# Altium PCB F1.PcbDoc
Units mil, origin at the board's own origin, x right, y up, seen from the top; angles counter-clockwise.
Board outline 2593.4 x 1102.5 mil, 2 copper layers (Top Layer, Bottom Layer); 2 components, 67 nets, 6 pads, 28 vias.
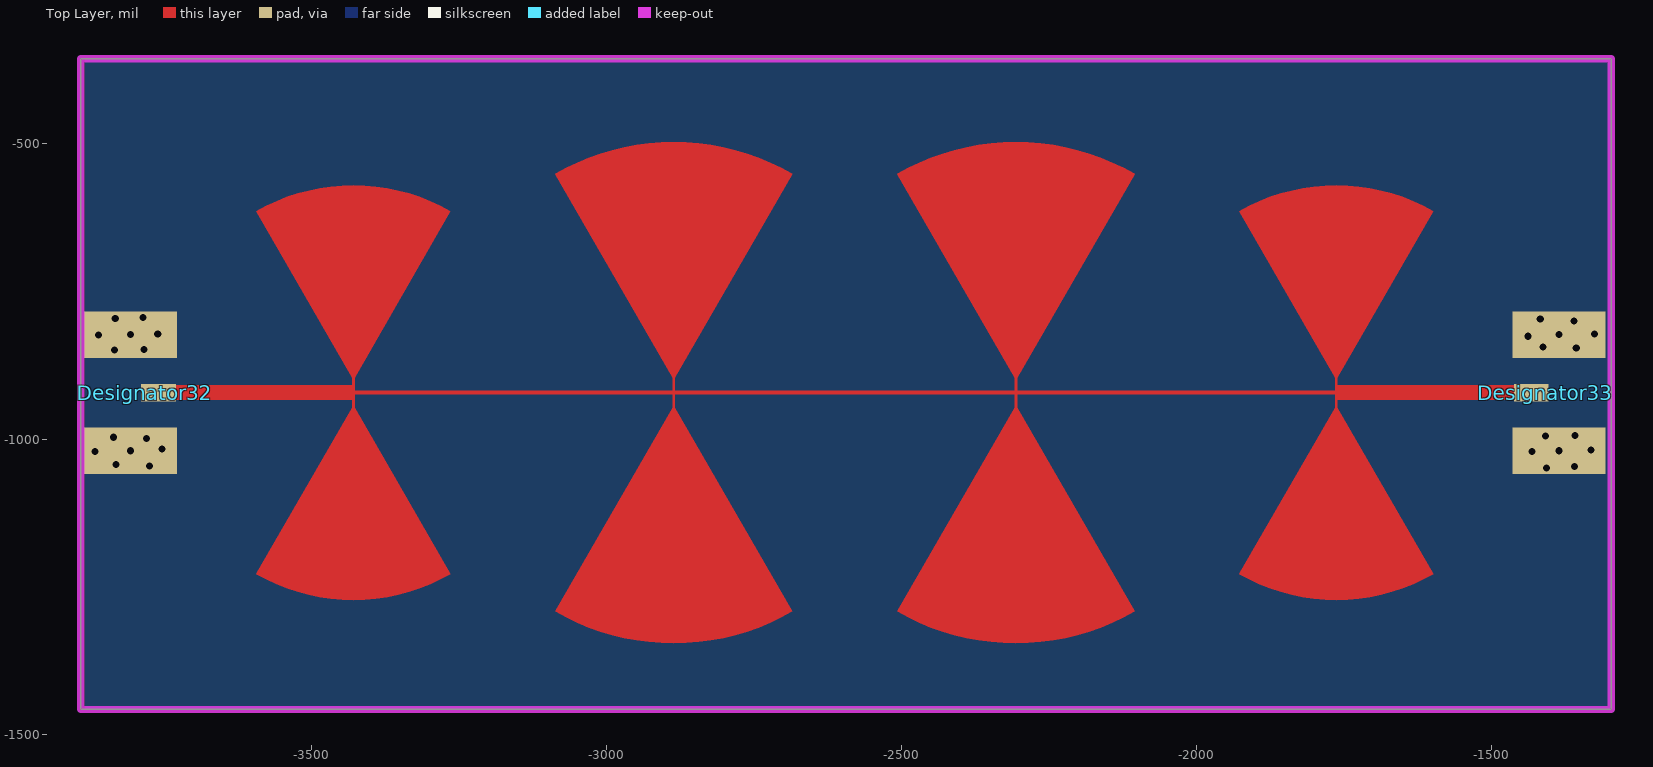
[diagram p0: Top Layer view]
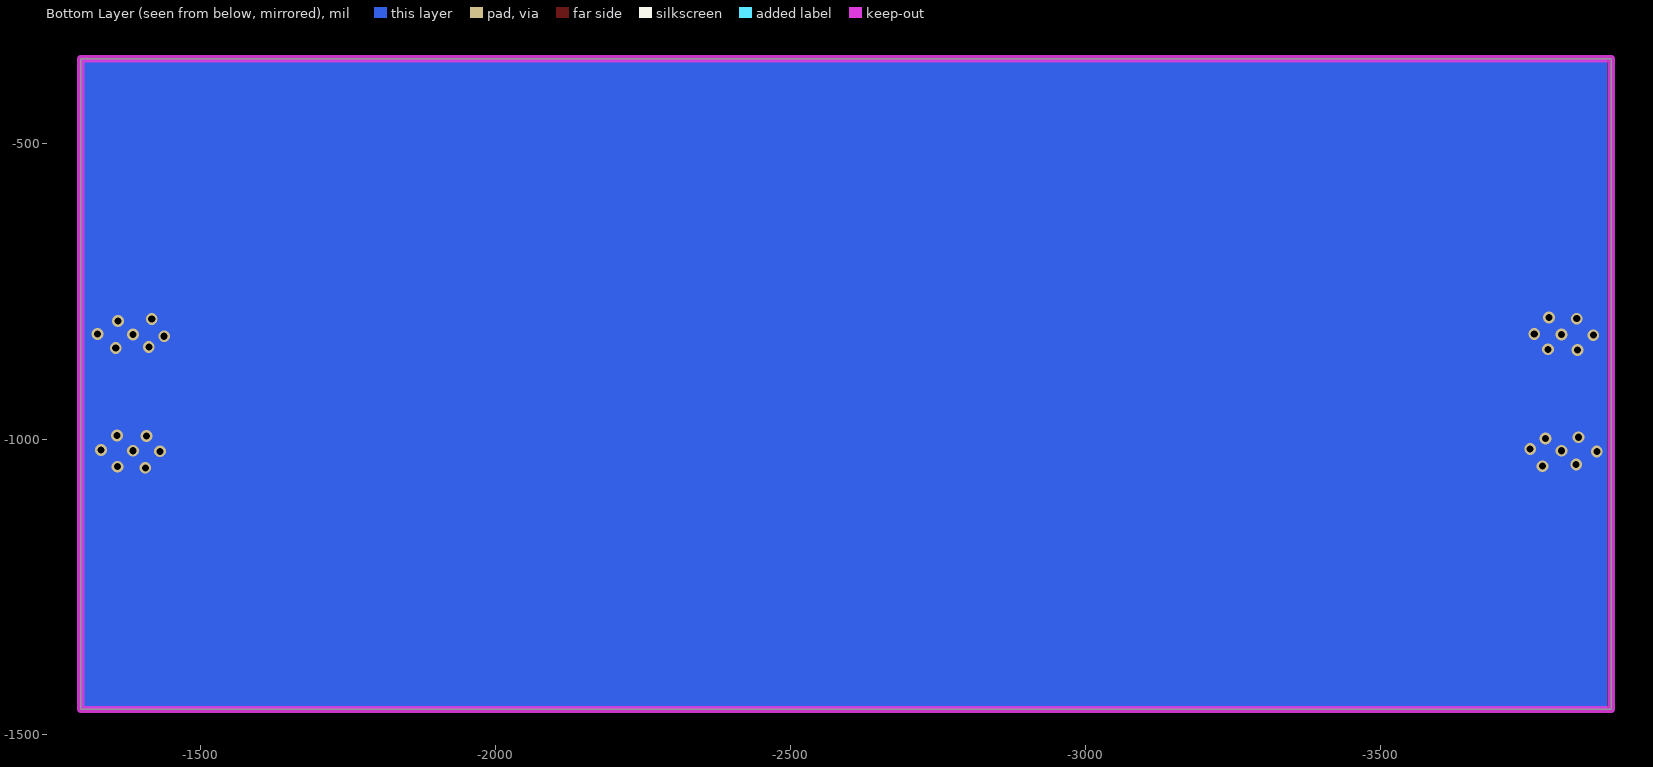
[diagram p1: Bottom Layer view, seen from below]

## Layer stack, top to bottom
Top Solder: solder mask 0.4, Solder Resist, Dk 3.5
Top Layer: signal copper 1.4
Dielectric 1: dielectric 12.6, FR-4, Dk 4.8
Bottom Layer: signal copper 1.4
Bottom Solder: solder mask 0.4, Solder Resist, Dk 3.5

## Board outline
-3890.4,-1458.1 -1297,-1458.1 -1297,-355.6 -3890.4,-355.6

## Design rules (kind name [scope] priority, off if disabled: settings)
Clearance [All] p1: gap=6
DiffPairsRouting [All] p1: maxlimit=10 minlimit=10 mostfreqgap=10 toplayer_minwidth=6 toplayer_maxwidth=15 toplayer_prefwidth=10 bottomlayer_minwidth=6 bottomlayer_maxwidth=15 bottomlayer_prefwidth=10 maxuncoupledlength=500
MinimumSolderMaskSliver [All] p1 off: minsoldermaskwidth=10
PlaneConnect [All] p1: planeconnectstyle=Direct reliefexpansion=20 reliefentries=4 reliefconductorwidth=10 reliefairgap=10
PolygonConnect [All] p1: connectstyle=Direct reliefconductorwidth=10 reliefentries=4 polygonreliefangle="90 Angle" airgapwidth=10
RoomDefinition JL2 [InComponentClass('JL2')] p1 off: confinementstyle=ConfineIn formatcopy=TRUE lockcomponents=FALSE outline -895.38,-2798.06 7189.62,-2798.06 7189.62,-2158.06 -895.38,-2158.06
RoutingVias [All] p1: holewidth=11.81 width=19.68 viastyle="Through Hole" minholewidth=11.81 minwidth=19.68 maxholewidth=28 maxwidth=50
SilkToBoardRegionClearance [All] p1 off:
SilkToSilkClearance [All] p1 off: silktosilkclearance=10
SilkToSolderMaskClearance [IsPad] p1 off: minsilkscreentomaskgap=10 clearancetoexposedcopper=TRUE
SolderMaskExpansion [All] p1: expansion=4
UnpouredPolygon [All] p1: allowunpoured=FALSE
Width [All] p1: maxlimit=30 minlimit=6 preferedwidth=10
23 further rules are at their usual default settings.

## Classes and differential pairs
differential pair TYPEC: +TYPEC_P -TYPEC_N
differential pair MCU_USB: +MCU_USB_P -MCU_USB_N

## Components (designator, comment, footprint, x,y, rotation, side; value= is the part's Value field where it differs from the comment)
Designator32 "Comment" SMA-2 -3806,-823 r270 top
Designator33 "Comment" SMA-2 -1385.36,-1019.8 r90 top

## Footprints (in the part's own frame and the unit in brackets; to place one, negate y for a bottom-side part, rotate by r counter-clockwise, add the part's x,y. Pads: shape width x height; smd on the part's side, far side on the other; paste and mask are expansions set on the pad)
SMA-2 [mm]
  rect 0.75x1.5 smd: 1(2.5,1.2)
  rect 2x4 smd: GND(0,0) GND(5,0)
  Top Layer pour cut-out: 1,2 4,2 4,-2 1,-2

## Via types
v1: diameter 20, hole 12, Top Layer to Bottom Layer, 28 vias

## Nets (pads, with @x,y where several pads share a name; then routed paths per layer and width w, separated by ;. In a path a pad name is that pad's centre, name@x,y a point inside that pad or via, vN(x,y) a via of type N, cw(c..) or ccw(c..) an arc to the next point about the centre after c; other vN are vias at no path point)
3V3: Designator32.1 Designator33.1
GND: Designator32.GND Designator33.GND
  other v1: -1406.36,-1048.8 -1359.36,-1046.8 -3774,-1046 -3831,-1043 -3866,-1021 -1431.36,-1020.8 -3806,-1019.85 -1385.36,-1019.8 -1331.36,-1018.8 -3753,-1017 -3779,-999 -3835,-997 -1408.36,-994.8 -1358.36,-993.8 -3833,-849 -3783,-848 -1356.36,-845.8 -1412.36,-843.8 -1438.36,-825.8 -3860,-824 -3806,-823 -1385.36,-822.95 -3760,-822 -1325.36,-821.8 -1360.36,-799.8 -1417.36,-796.8 -3832,-796 -3785,-794
MCU_USB_N: 
MCU_USB_P: 
NetC1_1: 
NetC3_1: 
NetC4_1: 
NetC5_2: 
NetC6_2: 
NetC7_2: 
NetC14_2: 
NetC15_2: 
NetC16_1: 
NetC17_2: 
NetLED1_1: 
NetLED2_1: 
NetP1_2: 
NetP1_3: 
NetR12_2: 
PA0: 
PA1: 
PA2: 
PA3: 
PA4: 
PA5: 
PA6: 
PA7: 
PA8: 
PA9: 
PA10: 
PA13: 
PA14: 
PA15: 
PB0: 
PB1: 
PB2: 
PB3: 
PB4: 
PB5: 
PB6: 
PB7: 
PB8: 
PB9: 
PB10: 
PB11: 
PB14: 
PB15: 
PC0: 
PC1: 
PC2: 
PC4: 
PC5: 
PC8: 
PC9: 
PC10: 
PC11: 
PC12: 
PC13: 
PC14: 
PC15: 
RST: 
SWCLK: 
SWDIO: 
SWO: 
TYPEC_N: 
TYPEC_P: 
VBUS: 

## Keep-outs
Keep-Out Layer:
  the board outline again, w12

## Other copper
Top Layer:
  region net 3V3: -3592.88,-1228.74 cw(c-3592.78,-1228.56) -3592.96,-1228.45 -3430.39,-946.87 -3430.39,-933.61 -3730.18,-933.61 cw(c-3730.18,-933.4) -3730.39,-933.4 -3730.39,-909.4 cw(c-3730.18,-909.4) -3730.18,-909.19 -3430.39,-909.19 -3430.39,-895.93 -3592.96,-614.35 cw(c-3592.78,-614.24) -3592.96,-614.35 cw(c-3592.78,-614.24) -3592.88,-614.06 cw(c-3428.45,-898.87) -3264.01,-614.06 cw(c-3264.12,-614.24) -3263.91,-614.24 cw(c-3264.12,-614.24) -3263.93,-614.35 -3263.94,-614.35 ccw(c-3264.12,-614.24) -3263.93,-614.35 -3263.94,-614.35 -3426.5,-895.93 -3426.5,-918.33 -2887.52,-918.33 -2887.52,-895.93 -3086.72,-550.9 -3086.72,-550.89 cw(c-3086.54,-550.79) -3086.64,-550.61 cw(c-2885.57,-898.87) -2684.5,-550.61 cw(c-2684.61,-550.79) -2684.39,-550.79 cw(c-2684.61,-550.79) -2684.42,-550.9 -2684.42,-550.89 cw(c-2684.61,-550.79) -2684.42,-550.9 -2684.42,-550.89 -2684.42,-550.9 -2883.63,-895.93 -2883.63,-918.33 -2307.73,-918.33 -2307.73,-895.93 -2506.93,-550.9 -2506.94,-550.89 cw(c-2506.75,-550.79) -2506.86,-550.61 cw(c-2305.79,-898.87) -2104.71,-550.61 cw(c-2104.82,-550.79) -2104.61,-550.79 cw(c-2104.82,-550.79) -2104.64,-550.9 -2104.63,-550.89 -2104.64,-550.9 ccw(c-2104.82,-550.79) -2104.63,-550.89 -2104.64,-550.9 -2303.84,-895.93 -2303.84,-918.33 -1764.85,-918.33 -1764.85,-895.93 -1927.42,-614.35 ccw(c-1927.24,-614.24) -1927.42,-614.35 cw(c-1927.24,-614.24) -1927.34,-614.06 cw(c-1762.91,-898.87) -1598.47,-614.06 cw(c-1598.58,-614.24) -1598.37,-614.24 cw(c-1598.58,-614.24) -1598.39,-614.35 -1598.4,-614.35 ccw(c-1598.58,-614.24) -1598.39,-614.35 -1598.4,-614.35 -1760.96,-895.93 -1760.96,-909.19 -1461.18,-909.19 cw(c-1461.18,-909.4) -1460.96,-909.4 -1460.96,-933.4 cw(c-1461.18,-933.4) -1461.18,-933.61 -1760.96,-933.61 -1760.96,-946.87 -1598.4,-1228.45 cw(c-1598.58,-1228.56) -1598.39,-1228.45 -1598.4,-1228.45 -1598.39,-1228.45 cw(c-1598.58,-1228.56) -1598.37,-1228.56 cw(c-1598.58,-1228.56) -1598.47,-1228.74 cw(c-1762.91,-943.93) -1927.34,-1228.74 cw(c-1927.24,-1228.56) -1927.42,-1228.45 -1764.85,-946.87 -1764.85,-924.47 -2303.84,-924.47 -2303.84,-946.87 -2104.64,-1291.9 -2104.63,-1291.91 ccw(c-2104.82,-1292.01) -2104.64,-1291.9 cw(c-2104.82,-1292.01) -2104.61,-1292.01 cw(c-2104.82,-1292.01) -2104.71,-1292.19 cw(c-2305.79,-943.93) -2506.86,-1292.19 cw(c-2506.75,-1292.01) -2506.94,-1291.91 -2506.93,-1291.9 -2307.73,-946.87 -2307.73,-924.47 -2883.63,-924.47 -2883.63,-946.87 -2684.42,-1291.9 -2684.42,-1291.91 ccw(c-2684.61,-1292.01) -2684.42,-1291.9 cw(c-2684.61,-1292.01) -2684.39,-1292.01 cw(c-2684.61,-1292.01) -2684.5,-1292.19 cw(c-2885.57,-943.93) -3086.64,-1292.19 cw(c-3086.54,-1292.01) -3086.72,-1291.91 -3086.72,-1291.9 -2887.52,-946.87 -2887.52,-924.47 -3426.5,-924.47 -3426.5,-946.87 -3263.94,-1228.45 cw(c-3264.12,-1228.56) -3263.93,-1228.45 -3263.94,-1228.45 -3263.93,-1228.45 cw(c-3264.12,-1228.56) -3263.91,-1228.56 cw(c-3264.12,-1228.56) -3264.01,-1228.74 cw(c-3428.45,-943.93)
Bottom Layer:
  rectangle net GND: -3883,-1458.1 -1297,-355.6

## Silkscreen, mask and mechanical layers (free items; w line width, h text height)
Bottom Solder:
  rectangle: -3888,-1108 -3684,-727
  rectangle: -1509,-1122 -1291,-720
Mechanical 2:
  lines w0.39: -3430.18,-921.4 -3426.72,-921.4 ; -3430.18,-921.4 -3430.18,-946.93 -3592.78,-1228.56 ccw(c-3428.45,-943.93) -3264.12,-1228.56 -3426.72,-946.93 -3426.72,-921.4 ; -3430.18,-921.4 -3426.72,-921.4 ; -3430.18,-921.4 -3430.18,-895.87 -3592.78,-614.24 cw(c-3428.45,-898.87) -3264.12,-614.25 -3426.72,-895.87 -3426.72,-921.4 ; -2887.3,-921.4 -2883.84,-921.4 ; -2887.3,-921.4 -2887.3,-946.93 -3086.54,-1292.01 ccw(c-2885.57,-943.93) -2684.61,-1292.01 -2883.84,-946.93 -2883.84,-921.4 ; -2887.3,-921.4 -2883.84,-921.4 ; -2887.3,-921.4 -2887.3,-895.87 -3086.54,-550.79 cw(c-2885.57,-898.87) -2684.61,-550.79 -2883.84,-895.87 -2883.84,-921.4 ; -2307.52,-921.4 -2304.05,-921.4 ; -2307.52,-921.4 -2307.52,-946.93 -2506.75,-1292.01 ccw(c-2305.79,-943.93) -2104.82,-1292.01 -2304.05,-946.93 -2304.05,-921.4 ; -2307.52,-921.4 -2304.05,-921.4 ; -2307.52,-921.4 -2307.52,-895.87 -2506.75,-550.79 cw(c-2305.79,-898.87) -2104.82,-550.79 -2304.05,-895.87 -2304.05,-921.4 ; -1764.64,-921.4 -1761.18,-921.4 ; -1764.64,-921.4 -1764.64,-946.93 -1927.24,-1228.56 ccw(c-1762.91,-943.93) -1598.58,-1228.56 -1761.18,-946.93 -1761.18,-921.4 ; -1764.64,-921.4 -1761.18,-921.4 ; -1764.64,-921.4 -1764.64,-895.87 -1927.24,-614.24 cw(c-1762.91,-898.87) -1598.58,-614.25 -1761.18,-895.87 -1761.18,-921.4 ; -1461.18,-933.4 -1761.18,-933.4 -1761.18,-909.4 -1461.18,-909.4 ; -1461.18,-933.4 -1461.18,-909.4 ; -1461.18,-933.4 -1461.18,-909.4 ; -3730.18,-933.4 -3430.18,-933.4 -3430.18,-909.4 -3730.18,-909.4 -3730.18,-933.4 ; -3426.72,-924.26 -2887.3,-924.26 -2887.3,-918.54 -3426.72,-918.54 -3426.72,-924.26 ; -2883.84,-924.26 -2307.52,-924.26 -2307.52,-918.54 -2883.84,-918.54 -2883.84,-924.26 ; -2304.05,-924.26 -1764.64,-924.26 -1764.64,-918.54 -2304.05,-918.54 -2304.05,-924.26